# Altium PCB Kodba_Mario.PcbDoc
Units mil, origin at the board's own origin, x right, y up, seen from the top; angles counter-clockwise.
Board outline 6000 x 4000 mil, 2 copper layers (Top Layer, Bottom Layer); 44 components, 31 nets, 142 pads, 46 vias.
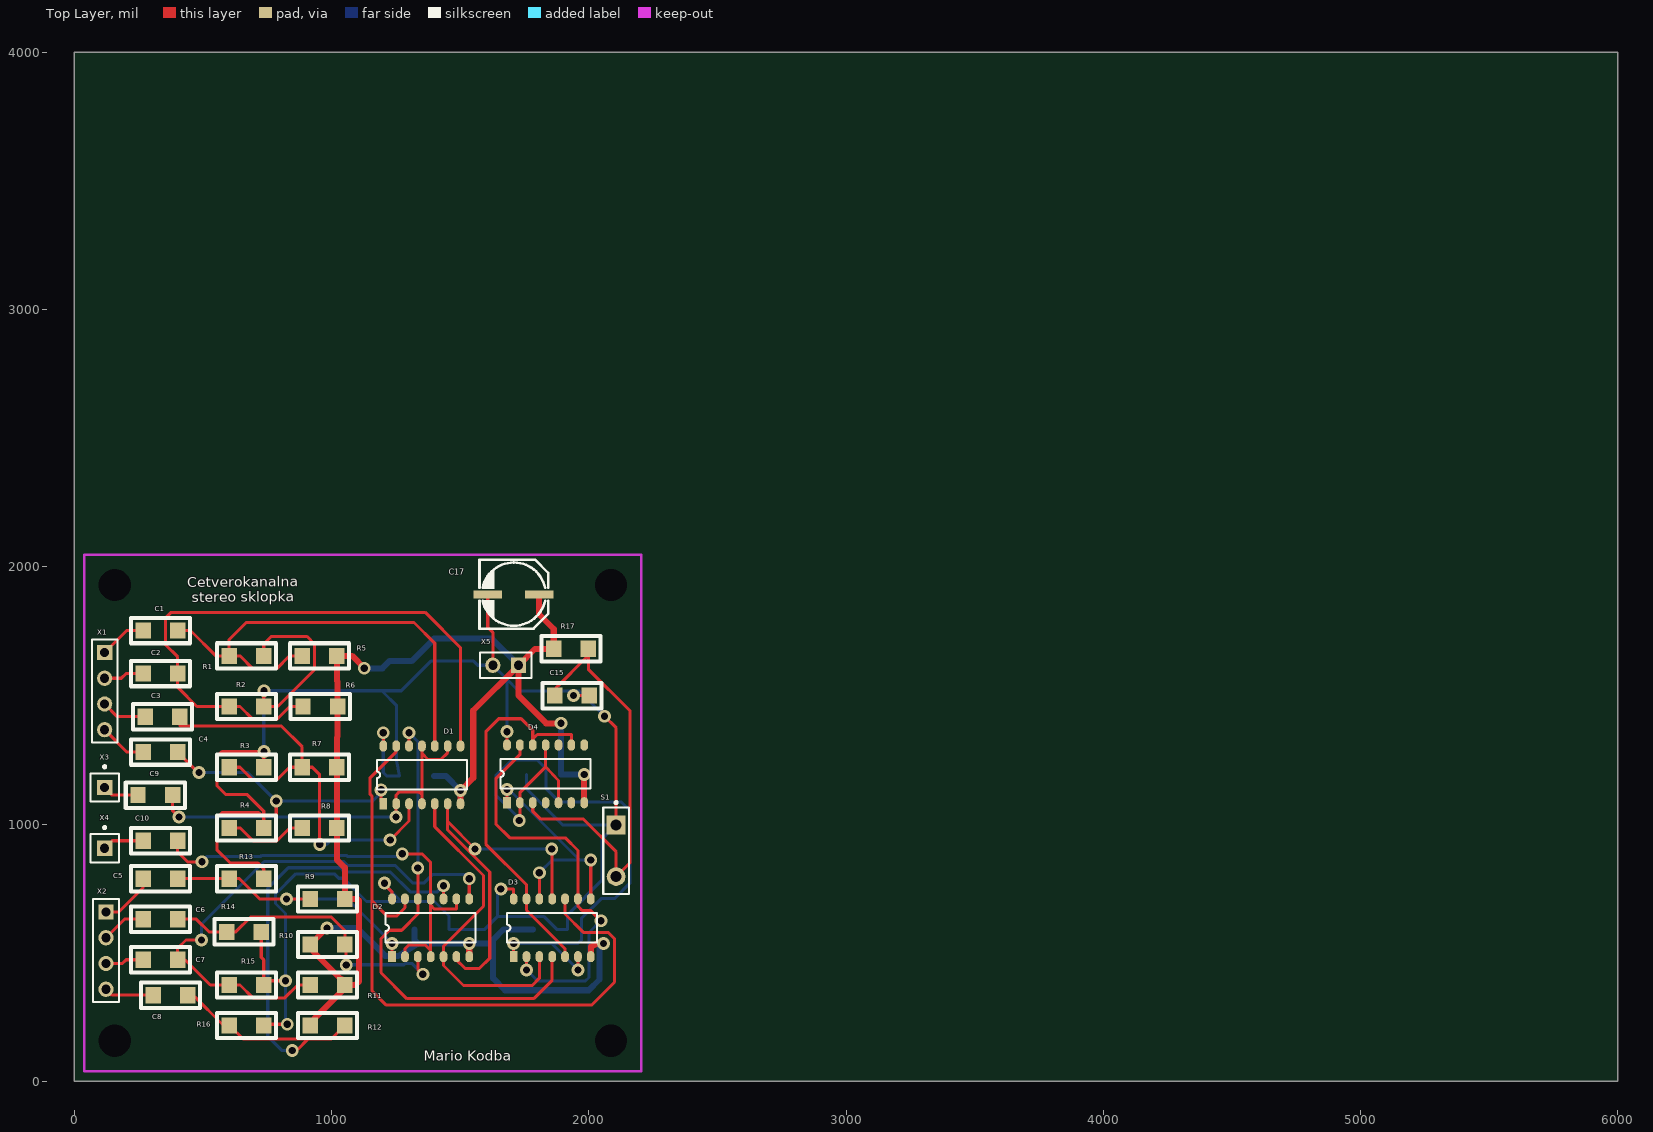
[diagram p0: Top Layer view]
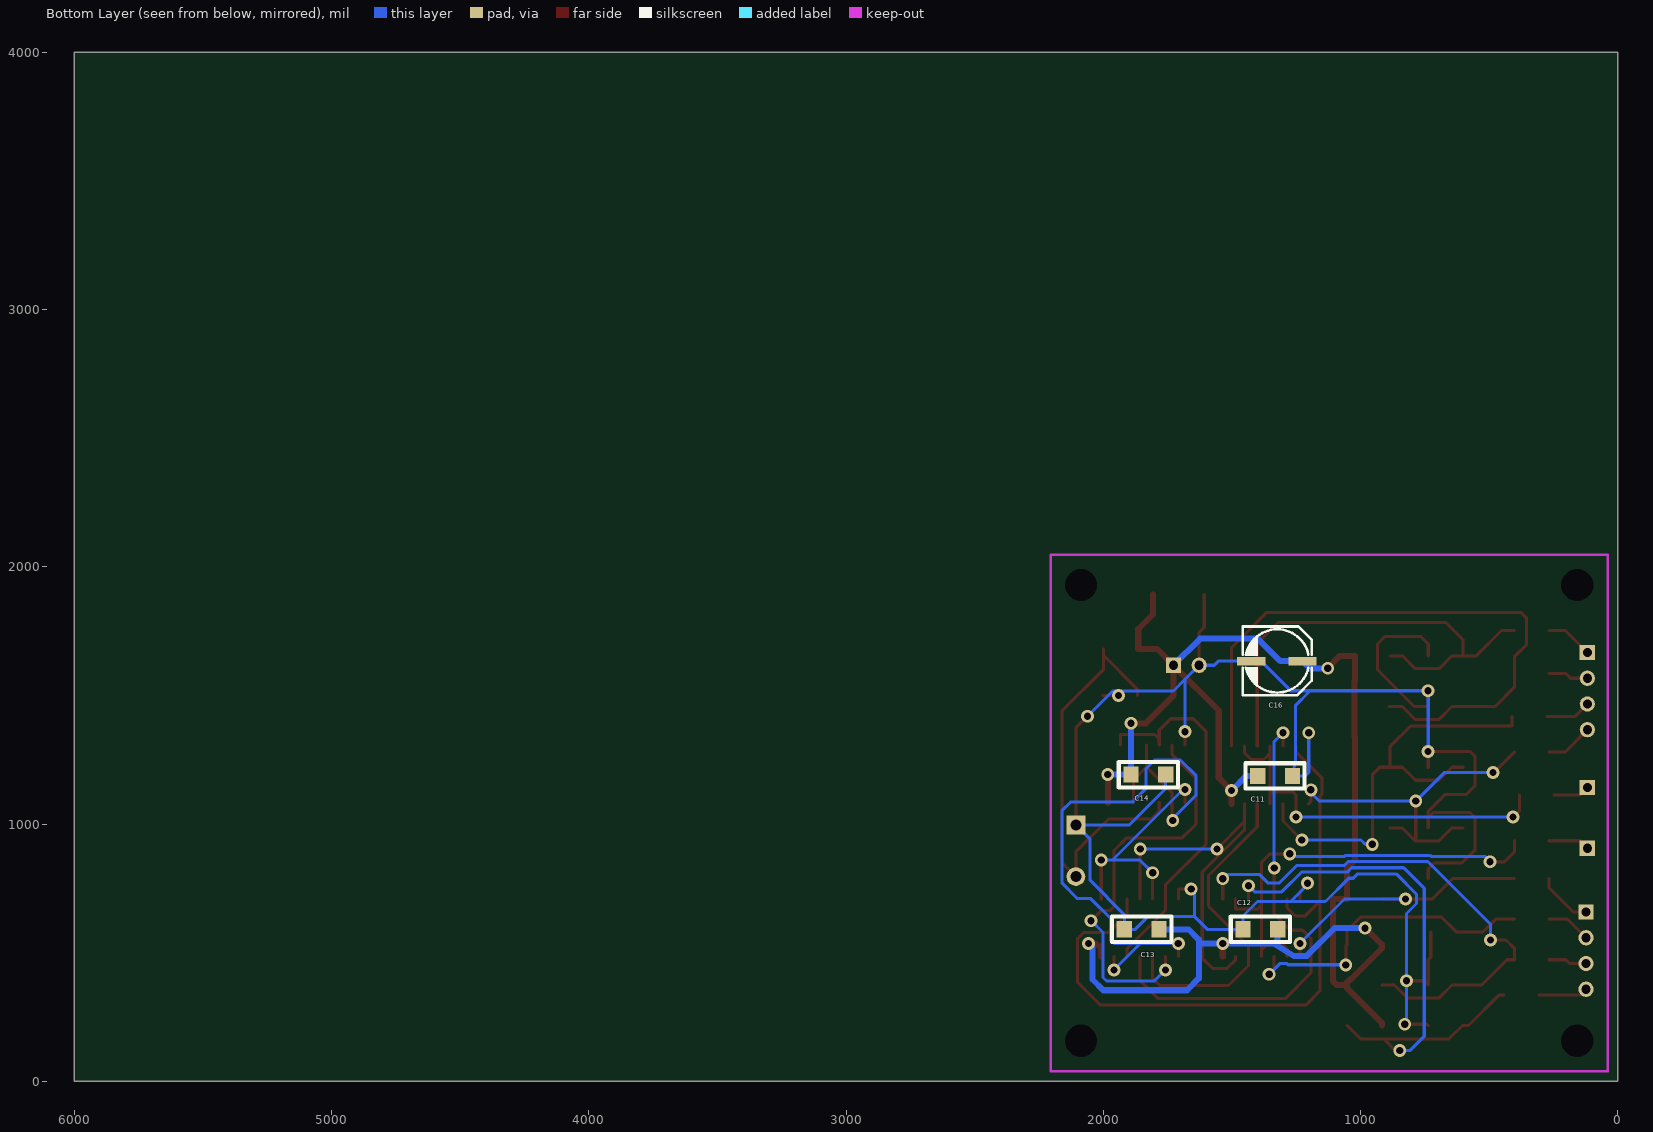
[diagram p1: Bottom Layer view, seen from below]

## Layer stack, top to bottom
Top Solder: solder mask 0.4, Solder Resist, Dk 3.5
Top Layer: signal copper 1.4
Dielectric 1: dielectric 12.6, FR-4, Dk 4.8
Bottom Layer: signal copper 1.4
Bottom Solder: solder mask 0.4, Solder Resist, Dk 3.5

## Board outline
0,0 6000,0 6000,4000 0,4000

## Design rules (kind name [scope] priority, off if disabled: settings)
Clearance [All] p1: gap=12 ignorepadtopadclearanceinfootprint=FALSE
HoleSize [All] p1: absolutevalues=TRUE maxlimit=125.98 minlimit=0.98 maxpercent=80.000 minpercent=20.000
PolygonConnect [All] p1: connectstyle=Relief reliefconductorwidth=10 reliefentries=4 polygonreliefangle="90 Angle" airgapwidth=10
RoutingVias [All] p1: holewidth=28 width=50 viastyle="Through Hole" minholewidth=28 minwidth=50 maxholewidth=28 maxwidth=50
SMDNeckDown [All] p1: percent=100.000
SilkToSolderMaskClearance [IsPad] p1: minsilkscreentomaskgap=2 clearancetoexposedcopper=TRUE
SolderMaskExpansion [All] p1: expansion=4
Width +5V [InNet('+5')] p1: maxlimit=40 minlimit=20 preferedwidth=20
Width GND [InNet('GND')] p2: maxlimit=60 minlimit=23.62 preferedwidth=23.62
Width [All] p3: maxlimit=60 minlimit=12 preferedwidth=12
28 further rules are at their usual default settings.

## Components (designator, comment, footprint, x,y, rotation, side; value= is the part's Value field where it differs from the comment)
C1 "1u" CAP-RES-1206 334.65,1751.97 r0 top
C2 "1u" CAP-RES-1206 334.65,1584.65 r0 top
C3 "1u" CAP-RES-1206 342.91,1417.32 r0 top
C4 "1u" CAP-RES-1206 334.65,1279.53 r0 top
C5 "1u" CAP-RES-1206 334.65,787.4 r0 top
C6 "1u" CAP-RES-1206 334.65,629.92 r0 top
C7 "1u" CAP-RES-1206 334.65,472.44 r0 top
C8 "1u" CAP-RES-1206 374.02,334.65 r0 top
C9 "1u" CAP-RES-1206 314.96,1112.2 r0 top
C10 "1u" CAP-RES-1206 334.65,935.04 r0 top
C11 "100n" CAP-RES-1206 1331.69,1187.01 r180 bottom
C12 "100n" CAP-RES-1206 1389.37,590.55 r0 bottom
C13 "100n" CAP-RES-1206 1850.39,590.55 r0 bottom
C14 "100n" CAP-RES-1206 1824.8,1191.93 r180 bottom
C15 "100n" CAP-RES-1206 1934.45,1499.02 r0 top
C16 "10u/16V" POLCap 1425.2,1632.87 r180 bottom value=10u
C17 "100u/35V" POLCap 1607.28,1892.72 r0 top value=100u
D1 "4066" SOP14 1201.38,1078.74 r90 top
D2 "4066" SOP14 1235.43,484.25 r90 top
D3 "4001" SOP14 1707.87,484.25 r90 top
D4 "4013" SOP14 1682.28,1082.68 r90 top
R1 "100k" CAP-RES-1206 669.29,1653.54 r0 top
R2 "100k" CAP-RES-1206 669.29,1456.69 r0 top
R3 "100k" CAP-RES-1206 669.29,1220.47 r0 top
R4 "100k" CAP-RES-1206 669.29,984.25 r0 top
R5 "100k" CAP-RES-1206 953.15,1653.54 r180 top
R6 "100k" CAP-RES-1206 956.3,1456.69 r180 top
R7 "100k" CAP-RES-1206 953.15,1220.47 r180 top
R8 "100k" CAP-RES-1206 953.15,984.25 r180 top
R9 "100k" CAP-RES-1206 984.25,708.66 r0 top
R10 "100k" CAP-RES-1206 984.25,531.5 r180 top
R11 "100k" CAP-RES-1206 984.25,374.02 r0 top
R12 "100k" CAP-RES-1206 984.25,216.54 r180 top
R13 "100k" CAP-RES-1206 669.29,787.4 r180 top
R14 "100k" CAP-RES-1206 659.45,580.71 r180 top
R15 "100k" CAP-RES-1206 669.29,374.02 r180 top
R16 "100k" CAP-RES-1206 669.29,216.54 r180 top
R17 "100k" CAP-RES-1206 1931.1,1681.1 r0 top
S1 "SW-PB" SPST-2 2106.3,895.67 r270 top
X1 "" HDR1X4 118.11,1666.54 r270 top
X2 "" HDR1X4 123.03,657.68 r270 top
X3 "" PIN1 118.11,1141.73 r0 top
X4 "" PIN1 118.11,905.51 r0 top
X5 "Power Connector" HDR1X2 1726.97,1617.13 r180 top

## Footprints (in the part's own frame and the unit in brackets; to place one, negate y for a bottom-side part, rotate by r counter-clockwise, add the part's x,y. Pads: shape width x height; smd on the part's side, far side on the other; paste and mask are expansions set on the pad)
CAP-RES-1206 [mm]
  rect 1.52x1.6 smd: 1(-1.71,0) 2(1.71,0)
  silkscreen extent -2.92,-1.25 2.92,1.25
HDR1X2 [mm] "Connector; Header; 2 Position"
  rect 1.5x1.5 hole 0.9: 1(0,0)
  round 1.5 hole 0.9: 2(2.54,0)
  silkscreen extent -1.27,-1.27 3.81,1.27
HDR1X4 [mm] "Connector; Header; 4 Position"
  rect 1.5x1.5 hole 0.9: 1(0,0)
  round 1.5 hole 0.9: 2(2.54,0) 3(5.08,0) 4(7.62,0)
  silkscreen extent -1.27,-1.27 8.89,1.27
PIN1 [mm] "Connector; Plug"
  rect 1.5x1.5 hole 0.9: 1(0,0)
  silkscreen extent -1.4,-1.4 1.4,2.17
POLCap [mm]
  rect 2.8x0.8 smd: 1(0,0) 2(5.08,0)
  silkscreen extent -0.81,-3.38 5.97,3.43
SOP14 [mm]
  rect 1.1x0.76 smd: 1(0,0)
  oval 1.1x0.76 smd: 2(0,-1.27) 3(0,-2.54) 4(0,-3.81) 5(0,-5.08) 6(0,-6.35) 7(0,-7.62) 8(5.7,-7.62) 9(5.7,-6.35) 10(5.7,-5.08) 11(5.7,-3.81) 12(5.7,-2.54) 13(5.7,-1.27) 14(5.7,0)
  silkscreen extent 1.38,-8.25 4.32,0.64
SPST-2 [mm] "Switch; 2 Leads"
  rect 1.85x1.85 hole 1.1: 1(-2.54,0)
  round 1.85 hole 1.1: 2(2.54,0)
  silkscreen extent -4.89,-1.27 4.28,1.27

## Part data
C1 C2 C3 C4 C5 C6 C7 C8 C9 C10 C11 C12 C13 C14 C15: library part Cap, "Capacitor", Dobavljaè=Farnell, Kuæište=CAP-RES-1206
  C1 C2 C3 C6 C7 C8 C10: Kat. broj=2112947, Opis komponente="Kondenzator keramièki 1u", Proizvoðaè=MULTICOMP, Redni broj=5.
  C4 C5 C9: Kat. broj=2112947, Opis komponente="Kondenzator keramièki 1µ", Proizvoðaè=MULTICOMP, Redni broj=5.
  C11 C12 C13 C14: Kat. broj=1702665, Opis komponente="Blokadni kondenzator keramicki 100n", Proizvoðaè=KEMET, Redni broj=8.
  C15: Kat. broj=2819609, Opis komponente="Kondenzator keramièki 100n", Proizvoðaè=KEMET, Redni broj=8.
C16 C17: library part Elektrolitski_kondenzator, Dobavljaè=Farnell, Kat. broj=8766894, Kuæište=POLCap, Proizvoðaè=MULTICOMP
  C16: Opis komponente="Elektrolitski kondenzator 10µ /16V ± 20%", Redni broj=6.
  C17: Opis komponente="Elektrolitski kondenzator 100u /35V ± 20%", Redni broj=7.
R1 R2 R3 R4 R5 R6 R7 R8 R9 R10 R11 R12 R13 R14 R15 R16 R17: library part Res2, "Resistor", Dobavljaè=Farnell, Kat. broj=9341129, Kuæište=CAP-RES-1206, Opis komponente="Otpornik 100k / 0.25W, ± 1%", Proizvoðaè=MULTICOMP, Redni broj=4.
S1: "Switch", Dobavljaè=Farnell, Kat. broj=1206168, Kuæište=SPST-2, Opis komponente=Tipkalo, Proizvoðaè="CARLING TECHNOLOGIES", Redni broj=12.
X1 X2: library part "Header 4", "-", Dobavljaè=Farnell, Kat. broj=1708334, Kuæište=HDR1X4, Opis komponente="Èetverokanalni konektor", Proizvoðaè=MULTICOMP, Redni broj=9.
  X1: Parameter 1=R
  X2: Parameter 1=L
X3: library part ConnectorPin, "ROUT", Dobavljaè=Farnell, Kat. broj=9731148, Kuæište=PIN1, Opis komponente=Konektor, Proizvoðaè=-, Redni broj=11.
X4: library part ConnectorPin, "LOUT", Dobavljaè=Farnell, Kat. broj=9731148, Kuæište=PIN1, Opis komponente=Konektor, Proizvoðaè=-, Redni broj=11.
X5: library part "Header 2", "Header, 2-Pin", Dobavljaè=Farnell, Kat. broj=9731148, Kuæište=HDR1X2, LatestRevisionDate=17-Jul-2002, LatestRevisionNote="Re-released for DXP Platform.", Opis komponente="Dvokanalni konektor", Proizvoðaè=-, Publisher="Altium Limited", Redni broj=10.
D1 D2: Dobavljaè=Chipoteka, Kat. broj=0000406601, Kuæište=SOP14, Opis komponente="Cetverokanalna sklopka", Proizvoðaè=-, Redni broj=1.
D3: Dobavljaè=Chipoteka, Kat. broj=0000400101, Kuæište=SOP14, Opis komponente="Cetveroulazna NOR vrata", Proizvoðaè=-, Redni broj=2.

## Free pads (board coordinates)
  round 118.11 hole 125.98: 0(157.48,157.48) 0(157.48,1929.13) 0(2086.61,157.48) 0(2086.61,1929.13)

## Via types
v1: diameter 50, hole 28, Top Layer to Bottom Layer, 46 vias

## Nets (pads, with @x,y where several pads share a name; then routed paths per layer and width w, separated by ;. In a path a pad name is that pad's centre, name@x,y a point inside that pad or via, vN(x,y) a via of type N, cw(c..) or ccw(c..) an arc to the next point about the centre after c; other vN are vias at no path point)
GND: C11.1 C12.1 C13.1 C14.1 C16.2 C17.2 D1.7 D2.7 D3.7 D4.7 R5.1 R6.1 R7.1 R8.1 R9.2 R10.2 R11.2 R12.2 R17.1 X5.1 | length 6442.9
  Top Layer w23.62: R12.2 916.93,227 1051.58,361.65 R11.2 ; v1(982,595) 980.43,595 R10.2 916.93,516.04 1034.78,398.19 1038.39,398.19 1051.58,385 R11.2 ; v1(1126.97,1605.32) 1128.23,1605.32 1080,1653.54 R5.1 1020.47,1556.15 1023.62,1553 R6.1 1023.62,1340.15 1020.47,1337 R7.1 R8.1 1020.47,861.1 1051.58,830 R9.2 1100,708.66 1106,702.66 1106,387.5 1092.52,374.02 R11.2 ; D1.7 v1(1501.38,1130) 1551,1179.62 1551,1441.16 X5.1 ; D2.7 v1(1535.43,535) ; C17.2 1807.28,1814.5 1863.78,1758 R17.1 1790.95,1681.1 X5.1 ; v1(1892.13,1391.43) 1834.57,1391.43 1726.97,1499.03 X5.1 ; D4.7 v1(1982.28,1191.93) ; D3.7 2007.87,523.26 2042.12,540.08 v1(2057,535)
  Bottom Layer w23.62: v1(982,595) 1101,595 1208.91,487.09 1259.14,487.09 1337.05,535 ; v1(1126.97,1605.32) 1197.64,1605.32 C16.2 1311,1632.87 1399.13,1721 1623.09,1721 X5.1 ; C12.1 1322.05,550 1337.05,535 ; C11.1 1444.37,1187.01 v1(1501.38,1130) ; C13.1 1668.55,590.55 1628,550 1628,535 ; v1(1892.13,1391.43) C14.1 v1(1982.28,1191.93) ; v1(2057,535) 2041.81,519.81 2041.81,395.45 2000,353.64 1674.36,353.64 1628,400 1628,535 ; 1337.05,535 v1(1535.43,535) 1628,535
NetC1_1: C1.1 X1.1 | length 184.6
  Top Layer w12: X1.1 203.54,1751.97 C1.1
NetC1_2: C1.2 D1.10 R1.1 R5.2 | length 1889
  Top Layer w12: C1.2 452,1751.97 550.43,1653.54 R1.1 ; R5.2 836.54,1653.54 787,1604 693.54,1604 644,1653.54 R1.1 ; D1.10 1401.38,1702.62 1320.54,1783.46 668.46,1783.46 601.97,1716.97 R1.1
NetC2_1: C2.1 X1.2 | length 156.7
  Top Layer w12: X1.2 183,1566.54 201.11,1584.65 C2.1
NetC2_2: C2.2 D1.8 R2.1 R6.2 | length 2443.9
  Top Layer w12: R6.2 837.69,1456.69 788,1407 693.69,1407 644,1456.69 R2.1 476.31,1456.69 401.97,1531.03 C2.2 401.97,1650 354,1697.97 354,1800 376.83,1822.83 1364.17,1822.83 1501.38,1685.62 D1.8
NetC3_1: C3.1 X1.3 | length 177.9
  Top Layer w12: X1.3 167.32,1417.32 C3.1
NetC3_2: C3.2 D1.3 R3.1 R7.2 | length 1753.5
  Top Layer w12: C3.2 410.24,1381 804.83,1381 885.83,1300 R7.2 ; R3.1 644,1220.47 694.47,1170 786,1170 836.47,1220.47 R7.2 ; v1(954,921) 954,1191.47 925,1220.47 R7.2 ; v1(1228,938) 1301.38,1011.38 D1.3
  Bottom Layer w12: v1(954,921) 981,921 998,938 v1(1228,938)
NetC4_1: C4.1 X1.4 | length 185.3
  Top Layer w12: X1.4 205.12,1279.53 C4.1
NetC4_2: C4.2 D1.1 R4.1 R8.2 | length 1432.2
  Top Layer w12: C4.2 481.69,1199.8 v1(485.24,1199.8) ; R4.1 645.24,984.25 695.49,934 785,934 ; v1(785,1089) 785,934 ; R8.2 837.25,984.25 787,934 785,934 ; v1(1192.91,1132.87) 1192.91,1087.21 D1.1
  Bottom Layer w12: v1(485.24,1199.8) 674.2,1199.8 v1(785,1089) 1159.38,1089 1192.91,1122.54 v1(1192.91,1132.87)
NetC5_1: C5.1 X2.1 | length 219
  Top Layer w12: X2.1 173.43,657.68 267.32,751.57 C5.1
NetC5_2: C5.2 D2.1 R9.1 R13.2 | length 1081
  Top Layer w12: C5.2 R13.2 642,787.4 720.74,708.66 v1(825,708.66) R9.1 ; v1(1235,536) 1235.43,535.57 D2.1
  Bottom Layer w12: v1(825,708.66) 1062.34,708.66 v1(1235,536)
NetC6_1: C6.1 X2.2 | length 174.2
  Top Layer w12: X2.2 195.28,629.92 C6.1
NetC6_2: C6.2 D2.3 R10.1 R14.2 | length 1245.7
  Top Layer w12: C6.2 474.2,629.92 523.41,580.71 R14.2 627.71,580.71 685,638 999.81,638 1051.58,586.24 R10.1 1057,526.07 v1(1057,452) ; D2.3 1335.43,435.57 v1(1355,416)
  Bottom Layer w12: v1(1057,452) 1057,451.69 1058.15,452.85 1281.6,452.85 1286.03,457.28 1313.72,457.28 v1(1355,416)
NetC7_1: C7.1 X2.3 | length 150.4
  Top Layer w12: X2.3 187,457.68 201.76,472.44 C7.1
NetC7_2: C7.2 D2.8 R11.1 R15.2 | length 2083.6
  Top Layer w12: v1(494.09,549.21) 434.21,549.21 401.97,516.97 C7.2 430.58,472.44 529,374.02 R15.2 644,374.02 694.02,324 818.56,324 868.57,374.02 R11.1 ; D2.8 v1(1535.43,787.5)
  Bottom Layer w12: v1(494.09,549.21) 494.09,609.09 739,854 1047.69,854 1063.69,838 1249,838 1317,770 1359,770 1392,803 1519.93,803 v1(1535.43,787.5)
NetC8_1: C8.1 X2.4 | length 193.2
  Top Layer w12: X2.4 146.07,334.64 C8.1
NetC8_2: C8.2 D2.10 R12.1 R16.2 | length 2293.4
  Top Layer w12: C8.2 462,334.64 580.11,216.54 R16.2 603.55,216.54 655.51,164.58 909.45,164.58 ; v1(847.44,119.09) 863.97,119.09 909.45,164.58 ; R12.1 1000,164.96 1000,164.58 909.45,164.58 ; v1(1435,760) 1435.43,759.57 D2.10
  Bottom Layer w12: v1(847.44,119.09) 807.91,119.09 752,175 752,750 832,830 1035,830 1052,813 1229.43,813 1306.43,736 1411,736 v1(1435,760)
NetC9_1: C9.1 X3.1 | length 141.8
  Top Layer w12: X3.1 147.64,1112.2 C9.1
NetC9_2: C9.2 D1.2 D1.4 D1.9 D1.11 | length 1506.5
  Top Layer w12: C9.2 382.28,1051.28 v1(406.56,1027) ; v1(1251,1027) 1251.38,1027.38 D1.2 1251.38,1112.5 1263.88,1125 1339,1125 1351.38,1112.62 ; D1.4 1351.38,1112.62 ; D1.11 1351.38,1274.62 ; D1.9 1451.38,1277.38 1425,1251 1375,1251 1351.38,1274.62 ; 1351.38,1112.62 1351.38,1274.62
  Bottom Layer w12: v1(406.56,1027) v1(1251,1027)
NetC10_1: C10.1 X4.1 | length 161.4
  Top Layer w12: X4.1 147.64,935.04 C10.1
NetC10_2: C10.2 D2.2 D2.4 D2.9 D2.11 | length 1730.2
  Top Layer w12: C10.2 401.97,891.03 440,853 v1(496,853) ; v1(1275,884) 1351.43,884 1385.43,850 D2.11 1385.43,683.57 ; D2.2 1285.43,514.87 1300,529.43 1364.57,529.43 1385.43,508.57 ; D2.4 1385.43,508.57 ; D2.9 1485.43,669 1400,669 1385.43,683.57 ; 1385.43,508.57 1385.43,683.57
  Bottom Layer w12: v1(496,853) 517,874 725.06,874 729.06,878 1057.63,878 1061.63,874 1265,874 v1(1275,884)
NetC15_1: C15.1 D4.3 R17.2 S1.2 | length 1704.4
  Top Layer w12: D4.3 1782.28,1050 1813.63,1018.65 1979.35,1018.65 2106.3,891.7 S1.2 2161,850.37 2161,1439 1998.43,1601.57 R17.2@1998.43,1655.3 ; C15.1 1867.13,1524 R17.2@1998.43,1655.3 ; R17.2 R17.2@1998.43,1655.3
NetD1_5: D1.5 D2.5 D3.3 | length 1272
  Top Layer w12: D1.5 1401.38,989.62 1591,800 1591,680.57 1435.43,525 D2.5 1435.43,450 1513.06,372.38 1780.25,372.38 1807.87,400 D3.3
NetD1_6: D1.6 D2.6 D3.11 | length 1484.6
  Top Layer w12: D1.6 1451.38,1009.62 ; D2.6 1485.43,472.24 1519.69,437.99 1574.8,437.99 1615,478.19 1615,813.38 1451.38,977 1451.38,1009.62 ; v1(1558,903) 1451.38,1009.62 ; v1(1856,903) 1857.87,901.13 D3.11
  Bottom Layer w12: v1(1558,903) v1(1856,903)
NetD1_12: D1.12 D2.12 D3.4 | length 1914.9
  Top Layer w12: D1.12 v1(1301.38,1355) ; v1(1335.43,829) D2.12 1335.43,650 1272.43,587 1225,587 1192,554 1192,422 1293.01,320.99 1785.87,320.99 1857.87,393 D3.4
  Bottom Layer w12: v1(1301.38,1355) 1335.43,1320.94 v1(1335.43,829)
NetD1_13: D1.13 D2.13 D3.10 | length 2657.6
  Top Layer w12: D1.13 1251.38,1281.38 1149.91,1179.91 1149.91,1115.06 1158,1106.98 1158,700 ; D2.13 1285.43,675 1252.43,642 1216,642 1158,700 ; D3.10 1907.87,650 1978.97,578.91 2075,578.91 2100,553.91 2100,385 2010.87,295.87 1213.13,295.87 1158,351 1158,700
NetD3_1: D3.1 D3.6 D4.2 D4.5 D4.11 | length 2509.2
  Top Layer w12: D3.1 1707.87,535.87 v1(1708,536) ; v1(1730,1014) 1732.28,1016.28 D4.2 1732.28,1122 1832.28,1222 ; D4.11 1832.28,1222 ; D4.5 1882.28,1169 1832.28,1222 ; v1(1957.87,433) D3.6
  Bottom Layer w12: v1(1708,536) 1854.87,536 ; v1(1730,1014) 1730,1021.5 1639,1112.5 1639,1188 1700,1249 1800,1249 1833,1216 1833,1139 1887,1085 2127,1085 2161,1051 2161,771 2100,710 2048,710 1972.34,634.34 1972.34,550 1958.34,536 1854.87,536 ; v1(1957.87,433) 1854.87,536
NetD3_2: D3.2 D3.9 D4.13 | length 1593.6
  Top Layer w12: D4.13 1732.28,1269.28 1639,1176 1639,1000 1693,946 1908.53,946 1957.87,896.66 D3.9 1957.87,680.13 1975,663 2008,663 v1(2047,624) ; v1(1757.87,433) D3.2
  Bottom Layer w12: v1(1757.87,433) 1800.87,390 1987.5,390 2001,403.5 2001,578 v1(2047,624)
NetD3_5: D3.5 D3.13 D4.9 D4.12 | length 1479.1
  Top Layer w12: D4.12 1782.28,1330.28 ; D3.5 1907.87,515.13 1757.87,665.13 D3.13 1757.87,763.94 1600,921.81 1600,1359 1650,1409 1737.28,1409 1782.28,1364 1782.28,1330.28 ; D4.9 1932.28,1348 1800,1348 1782.28,1330.28
NetD3_8: D3.8 D3.12 D4.1 | length 920.5
  Top Layer w12: v1(1682,1134) 1682.28,1133.72 D4.1 ; D3.12 v1(1807.87,810.32) ; D3.8 v1(2007.87,860)
  Bottom Layer w12: v1(1682,1134) 1690,1134 1964,860 ; v1(1807.87,810.32) 1857.56,860 1964,860 ; v1(2007.87,860) 1964,860
VCC: C11.2 C12.2 C13.2 C14.2 C15.2 C16.1 C17.1 D1.14 D2.14 D3.14 D4.14 R1.2 R2.2 R3.2 R4.2 R13.1 R14.1 R15.1 R16.1 S1.1 X5.2 | length 8935.9
  Top Layer w12: R14.1 726.77,481.84 736.61,472 R15.1 753.35,390.75 v1(820.87,390.75) ; R16.1 741.53,221.46 v1(827.76,221.46) ; R13.1 736.61,825 712.72,848.9 605.1,848.9 554,900 554,1025 574,1045 716.61,1045 736.61,1025 ; R4.2 736.61,1025 ; R3.2 v1@736.61,1281.61 ; R1.2 736.61,1700 765.23,1728.61 905.39,1728.61 934,1700 934,1600 790.69,1456.69 R2.2 ; v1(737,1282) v1@736.61,1281.61 ; v1(1201,1355) 1201.38,1354.62 D1.14 ; v1(1206,770) 1206,764.43 1235.43,735 D2.14 ; C17.1 1607.28,1764.68 1626.97,1745 X5.2 ; v1(1658.13,747.13) 1707.87,747.13 D3.14 ; v1(1682,1359) 1682.28,1358.72 D4.14 ; v1(1940.98,1499.02) C15.2 ; v1(2061,1419) 2106.3,1373.7 S1.1 ; 736.61,1025 736.61,1050 672.61,1114 590,1114 554,1150 554,1262.5 573.5,1282 v1@736.61,1281.61 ; R2.2 736.61,1517.61 v1(737,1518) R2.2
  Bottom Layer w12: v1@736.61,1517.61 736.61,1282.39 v1(737,1282) ; v1(737,1518) 1197.83,1518 ; v1(827.76,221.46) 820.87,228.35 v1(820.87,390.75) 820.87,651.98 782,690.85 782,726.47 861.53,806 1011,806 1028,789 1046,789 1136,699 1271.43,699 ; v1(1201,1355) 1201,1200 1213.99,1187.01 C11.2 1253,1246.85 1253,1460 1197.83,1515.17 1197.83,1518 ; v1(1206,770) 1206,764.43 1271.43,699 ; v1(1658.13,747.13) 1646,735 1646,641 ; v1(1682,1359) 1682,1562.09 ; C14.2 1757.48,1138.26 1900.07,995.67 S1.1 2051,940.37 2051,781 1917.72,647.72 C13.2 1875,590.55 1824.55,641 1646,641 ; v1(1940.98,1499.02) 1923,1517 ; v1(2061,1419) 1963,1517 1923,1517 ; 1197.83,1518 1271.13,1518 1386,1632.87 C16.1 1552.32,1632.87 1568.07,1617.13 X5.2 1682,1562.09 ; 1271.43,699 1400,699 1456.69,642.31 C12.2 1595.55,590.55 1646,641 ; 1682,1562.09 1727.09,1517 1923,1517
pads on no net: D4.4 D4.6 D4.8 D4.10

## Keep-outs
Keep-Out Layer:
  lines w10: 39.37,39.37 39.37,1535.43 39.37,1830.71 39.37,2047.24 2204.72,2047.24 2204.72,39.37 39.37,39.37

## Silkscreen, mask and mechanical layers (free items; w line width, h text height)
Top Overlay:
  text "Cetverokanalna /  stereo sklopka" at 439.96,1862.2 h39.37 r0.43
  text "Mario Kodba" at 1358.27,78.74 h39.37
Mechanical 1:
  circle w10: c157.48,157.48 r118.11
  circle w10: c157.48,1929.13 r118.11
  circle w10: c2086.61,157.48 r118.11
  circle w10: c2086.61,1929.13 r118.11
  lines w10: 0,0 0,1594.49 0,1830.71 0,1870.08 0,2086.61 2086.61,2086.61 2244.09,2086.61 2244.09,0 2047.24,0 0,0
Drill Drawing:
  circle w10: c114.13,-456.68 r29.66
  lines w10: 84.47,-753.26 143.78,-753.26 143.78,-693.94 84.47,-693.94 84.47,-753.26 ; 84.47,-560.48 143.78,-560.48 114.13,-619.8 84.47,-560.48 ; 84.47,-338.05 99.3,-338.05 114.13,-352.88 128.95,-338.05 143.78,-338.05 128.95,-323.22 143.78,-308.39 128.95,-308.39 114.13,-293.57 99.3,-308.39 84.47,-308.39 99.3,-323.22 84.47,-338.05
  lines w15: 30.93,-793.3 3728.4,-793.3 ; 30.93,-259.46 3728.4,-259.46 ; 524.58,-926.75 524.58,-126 ; 1007.12,-926.75 1007.12,-126 ; 2050,-926.75 2050,-126 ; 2503.62,-926.75 2503.62,-126 ; 3160.03,-926.75 3160.03,-126 ; 30.93,-926.75 3728.4,-926.75 3728.4,-126 30.93,-126 30.93,-926.75
  text "Symbol" at 111,-219.42 h64.06
  text "Count" at 564.62,-219.42 h64.06
  text "Hole Size" at 1047.16,-219.42 h64.06
  text "Plated" at 2090.04,-219.42 h64.06
  text "Hole Type" at 2543.66,-219.42 h64.06
  text "Via/Pad" at 3200.07,-219.42 h64.06
  text "46" at 564.62,-352.88 h53.38
  text "0,711mm (28,00mil)" at 1047.16,-352.88 h53.38
  text "PTH" at 2090.04,-352.88 h53.38
  text "Round" at 2543.66,-352.88 h53.38
  text "Via" at 3200.07,-352.88 h53.38
  text "12" at 564.62,-486.34 h53.38
  text "0,900mm (35,43mil)" at 1047.16,-486.34 h53.38
  text "PTH" at 2090.04,-486.34 h53.38
  text "Round" at 2543.66,-486.34 h53.38
  text "Pad" at 3200.07,-486.34 h53.38
  text "2" at 564.62,-619.8 h53.38
  text "1,100mm (43,31mil)" at 1047.16,-619.8 h53.38
  text "PTH" at 2090.04,-619.8 h53.38
  text "Round" at 2543.66,-619.8 h53.38
  text "Pad" at 3200.07,-619.8 h53.38
  text "4" at 564.62,-753.26 h53.38
  text "3,200mm (125,98mil)" at 1047.16,-753.26 h53.38
  text "PTH" at 2090.04,-753.26 h53.38
  text "Round" at 2543.66,-753.26 h53.38
  text "Pad" at 3200.07,-753.26 h53.38
  text "64 Total" at 564.62,-886.72 h53.38